# Altium PCB PCB_AD.PcbDoc
Units mil, origin at the board's own origin, x right, y up, seen from the top; angles counter-clockwise.
Board outline 1889.76 x 866.14 mil, 2 copper layers (Top Layer, Bottom Layer); 22 components, 21 nets, 96 pads, 22 vias.
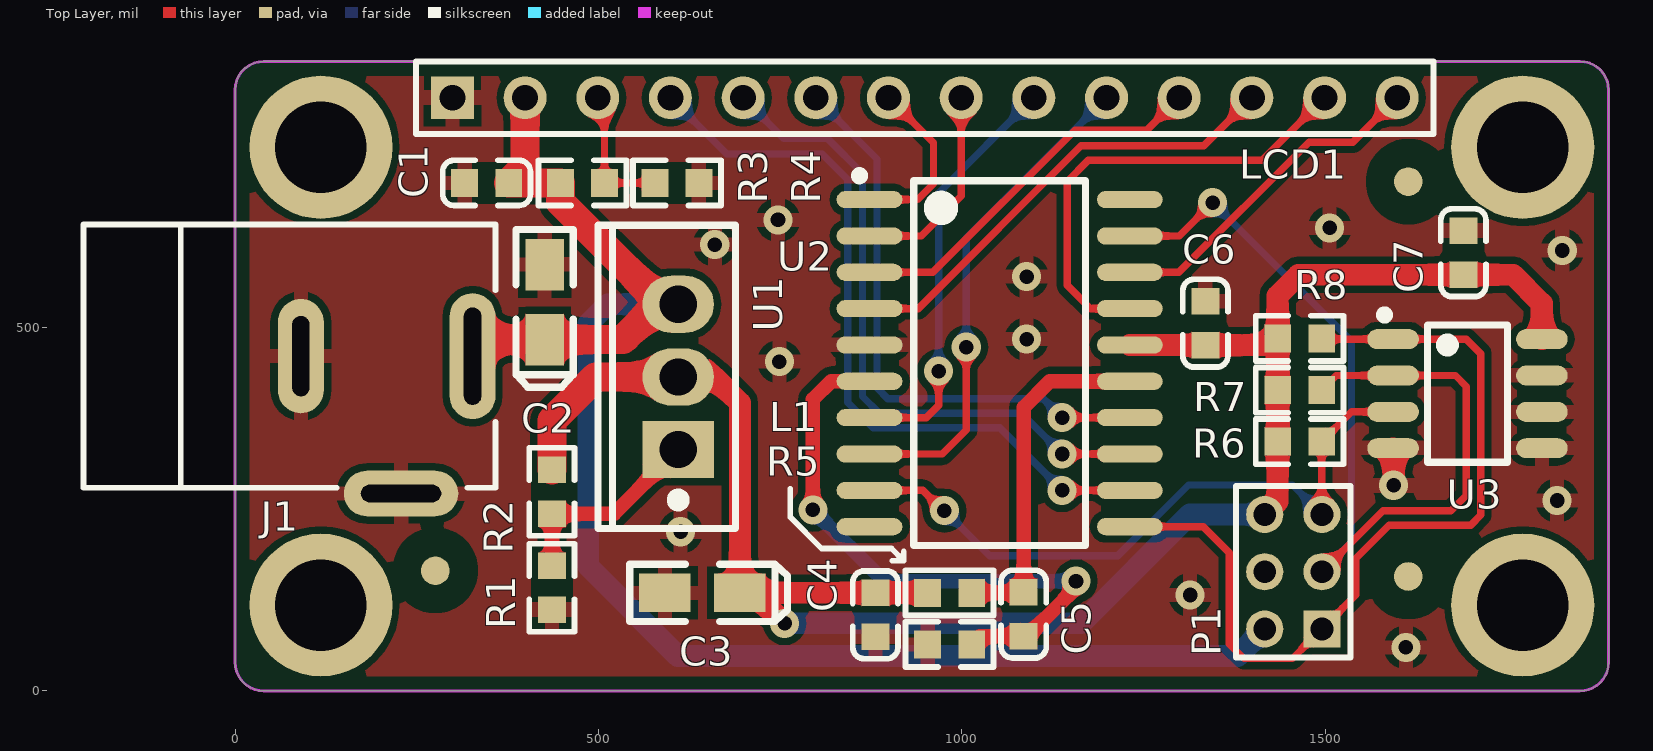
[diagram p0: Top Layer view]
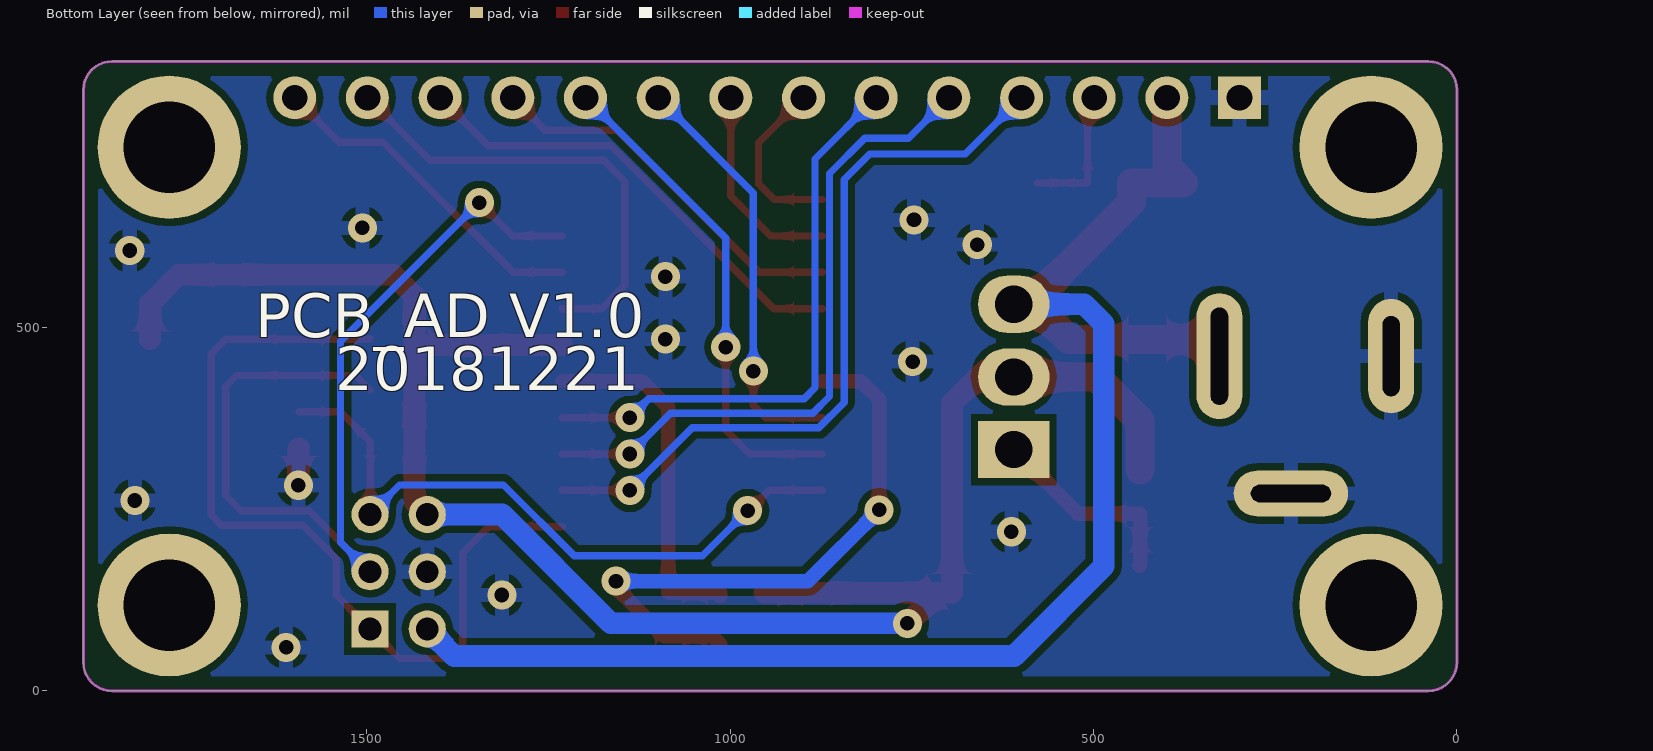
[diagram p1: Bottom Layer view, seen from below]
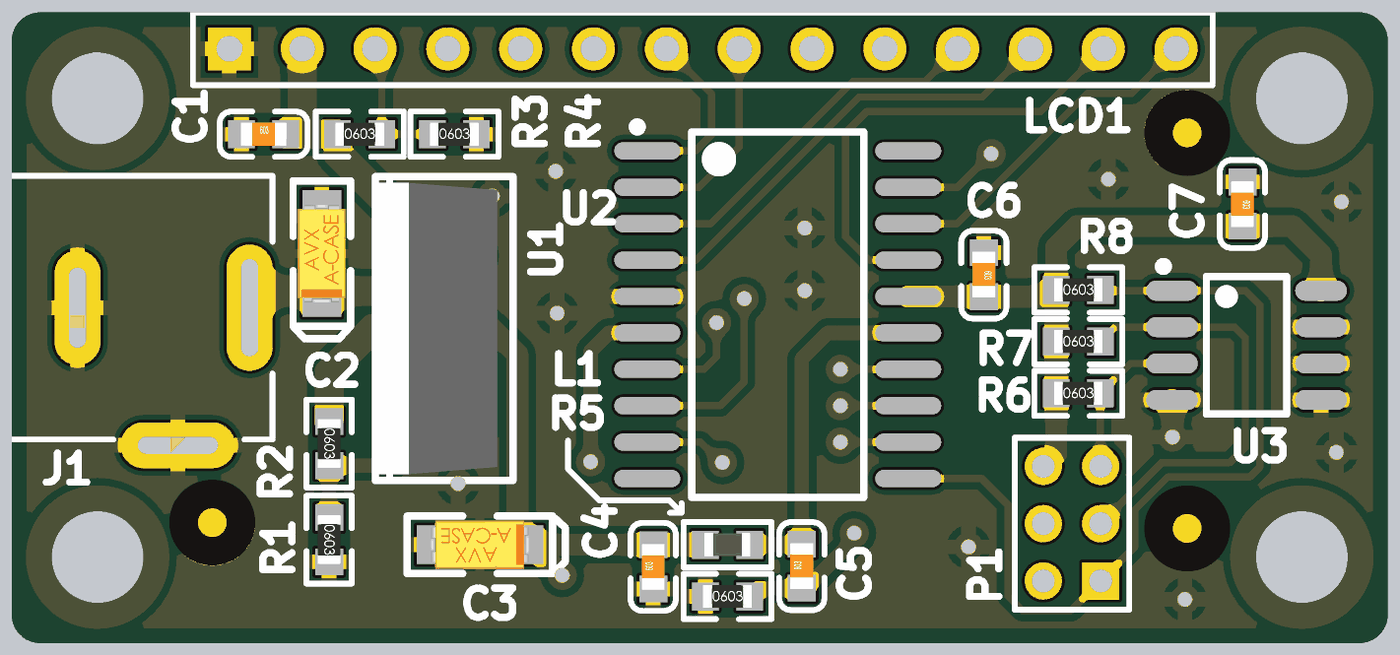
[diagram p2: 3D render of the assembled board from above, using the file's embedded part models]

## Layer stack, top to bottom
Top Solder: solder mask 0.4, Solder Resist, Dk 3.5
Top Layer: signal copper 1.4
Dielectric 1: dielectric 12.6, FR-4, Dk 4.8
Bottom Layer: signal copper 1.4
Bottom Solder: solder mask 0.4, Solder Resist, Dk 3.5

## Board outline
0,39.37 0,826.77 cw(c39.37,826.77) 39.37,866.14 1850.39,866.14 cw(c1850.39,826.77) 1889.76,826.77 1889.76,39.37 cw(c1850.39,39.37) 1850.39,0 39.37,0 cw(c39.37,39.37)

## Design rules (kind name [scope] priority, off if disabled: settings)
BoardOutlineClearance [All] p1: gap=20 ignorepadtopadclearanceinfootprint=FALSE except(0: Track-OutlineEdge; 15: THPad-OutlineEdge)
Clearance [All] p1: gap=10 ignorepadtopadclearanceinfootprint=FALSE
HoleSize [All] p1: absolutevalues=TRUE maxlimit=200 minlimit=10 maxpercent=80.000 minpercent=20.000
PlaneConnect [All] p1: planeconnectstyle=Relief reliefexpansion=20 reliefentries=4 reliefconductorwidth=20 reliefairgap=10
PolygonConnect [All] p1: connectstyle=Relief reliefconductorwidth=20 reliefentries=4 polygonreliefangle="90 Angle" airgapwidth=10
RoutingVias [All] p1: holewidth=20 width=40 viastyle="Through Hole" minholewidth=10 minwidth=20 maxholewidth=30 maxwidth=50
SilkToSolderMaskClearance [IsPad] p1: minsilkscreentomaskgap=5 clearancetoexposedcopper=TRUE
SolderMaskExpansion [All] p1: expansion=4
Width [All] p1: maxlimit=40 minlimit=10 preferedwidth=10
27 further rules are at their usual default settings.

## Classes and differential pairs
net class RB[0..7]: RB0 RB1 RB2 RB3 RB4 RB5 RB6 RB7
component class Sensor: C7 U3
component class Power: C2 C3 C4 C5 J1 L1 R1 R2 R5 U1
component class PCB_AD_Top: P1
component class MCU: C6 R6 R7 R8 U2
component class LCD: C1 LCD1 R3 R4

## Components (designator, comment, footprint, x,y, rotation, side; value= is the part's Value field where it differs from the comment)
C1 "Cap Semi" 0603_C 346,699 r0 top value=100pF
C2 "Cap Pol3" CASE-A_3216 426,535 r270 top value=100pF (schematic designator C3)
C3 "Cap Pol3" CASE-A_3216 643,135 r0 top value=100pF (schematic designator C4)
C4 "Cap Semi" 0603_C 881,104.68 r90 top value=100pF (schematic designator C5)
C5 "Cap Semi" 0603_C 1085,105.68 r90 top value=100pF (schematic designator C6)
C6 "Cap Semi" 0603_C 1335,506 r270 top value=100pF (schematic designator C2)
C7 "Cap Semi" 0603_C 1690,603 r270 top value=100pF
J1 "PWR2.5" DC005F 74.8,460.63 r0 top
L1 "Inductor" 0603_L 983,135 r0 top value=10mH
LCD1 "DMC-50448N" HDR1X14 299,816.14 r0 top
P1 "Header 3X2" PH2X3 1456,164 r90 top
R1 "Res3" 0603_R 436,142 r270 top value=8.66K (schematic designator R7)
R2 "Res3" 0603_R 436,274 r270 top value=1K (schematic designator R6)
R3 "Res3" 0603_R 478,699 r0 top value=1K (schematic designator R1)
R4 "Res3" 0603_R 608,699 r0 top value=1K (schematic designator R2)
R5 "Res3" 0603_R 983,64 r0 top value=1K (schematic designator R8)
R6 "Res3" 0603_R 1464.68,343 r0 top value=1K (schematic designator R3)
R7 "Res3" 0603_R 1464.68,414 r0 top value=1K (schematic designator R4)
R8 "Res3" 0603_R 1464.68,485 r0 top value=1K (schematic designator R5)
U1 "LM317KCT" TO-220(TO-220-3) 609.68,432.01 r90 top (schematic designator U2)
U2 "PIC16C770-I/SO" SOIC-20_300mil 1052,451 r270 top (schematic designator U1)
U3 "TCN75-3.3MOA" SOIC-8_150mil 1695.64,409 r270 top

## Footprints (in the part's own frame and the unit in brackets; to place one, negate y for a bottom-side part, rotate by r counter-clockwise, add the part's x,y. Pads: shape width x height; smd on the part's side, far side on the other; paste and mask are expansions set on the pad)
0603_C [mm]
  rect 0.93x0.98 smd: 1(-0.77,0) 2(0.77,0)
  silkscreen extent -1.53,-0.79 1.54,0.79, body extent -0.8,-0.4 0.8,0.4, height 0.3
0603_L [mm]
  rect 0.93x0.98 smd: 1(-0.77,0) 2(0.77,0)
  silkscreen extent -1.53,-0.79 1.54,0.79, body extent -0.82,-0.41 0.83,0.41, height 0.46
0603_R [mm]
  rect 0.93x0.98 smd: 1(-0.77,0) 2(0.77,0)
  silkscreen extent -1.53,-0.79 1.54,0.79, body extent -0.85,-0.4 0.85,0.4, height 0.56
CASE-A_3216 [mm]
  rect 1.8x1.35 smd: 1(1.31,0) 2(-1.31,0)
  silkscreen extent -2.54,-1 2.97,1, body extent -1.7,-0.84 1.7,0.84, height 1.71
DC005F [mm]
  oval 1.6x4.4 hole 0.6 slot 3.4 at 90 deg: 1(6.4,0)
  oval 1.6x4 hole 0.6 slot 2.8 at 90 deg: 2(0.4,0)
  oval 4x1.6 hole 0.6 slot 2.8 at 0 deg: 3(3.9,-4.8)
  rrect50% 0.4x2 on Mech13: ""(0.4,0)
  rrect50% 2x0.4 on Mech13: ""(3.9,-4.8)
  rrect50% 0.4x3 on Mech13: ""(6.4,0)
  silkscreen extent -7.2,-4.6 7.2,4.6
HDR1X14 [mm] "Connector; Header; 14 Position"
  rect 1.5x1.5 hole 0.9: 1(0,0)
  round 1.5 hole 0.9: 2(2.54,0) 3(5.08,0) 4(7.62,0) 5(10.16,0) 6(12.7,0) 7(15.24,0) 8(17.78,0) 9(20.32,0) 10(22.86,0) 11(25.4,0) 12(27.94,0) 13(30.48,0) 14(33.02,0)
  silkscreen extent -1.27,-1.27 34.29,1.27
PH2X3 [mm] "2.0"
  rect 1.3x1.3 hole 0.8: 1(-2,-1)
  round 1.3 hole 0.8: 2(-2,1) 3(0,-1) 4(0,1) 5(2,-1) 6(2,1)
  silkscreen extent -3,-2 3,2
SOIC-8_150mil [mm]
  oval 0.7x1.8 smd: 1(-1.905,-2.6) 2(-0.635,-2.6) 3(0.635,-2.6) 4(1.905,-2.6) 5(1.905,2.6) 6(0.635,2.6) 7(-0.635,2.6) 8(-1.905,2.6)
  silkscreen extent -2.9,-3.05 2.4,1.4
SOIC-20_300mil [mm]
  oval 0.6x2.3 smd: 1(-5.715,-4.55) 2(-4.445,-4.55) 3(-3.175,-4.55) 4(-1.905,-4.55) 5(-0.635,-4.55) 6(0.635,-4.55) 7(1.905,-4.55) 8(3.175,-4.55) 9(4.445,-4.55) 10(5.715,-4.55) 11(5.715,4.55) 12(4.445,4.55) 13(3.175,4.55) 14(1.905,4.55) 15(0.635,4.55) 16(-0.635,4.55) 17(-1.905,4.55) 18(-3.175,4.55) 19(-4.445,4.55) 20(-5.715,4.55)
  silkscreen extent -6.7,-5.05 6.38,3
TO-220(TO-220-3) [mm]
  rect 2x2.5 hole 1.3: 1(-2.54,0)
  oval 2x2.5 hole 1.3: 2(0,0) 3(2.54,0)
  silkscreen extent -5.3,-2 5.3,2.8, body extent -5.08,-1.45 5.08,2.9, height 19.6

## Part data
C1 C4 C5 C6 C7: "Capacitor (Semiconductor SIM Model)", LatestRevisionDate=29-May-2009, LatestRevisionNote="IPC-7351 Footprint Added.", PackageDescription="Chip Capacitor", PackageReference=C1206, Published=8-Jun-2000, Publisher="Altium Limited"
C2 C3: "Polarized Capacitor (Surface Mount)", LatestRevisionDate=29-May-2009, LatestRevisionNote="IPC-7351 Footprint Added.", PackageDescription="Chip Capacitor", PackageReference=C0805, Published=8-Jun-2000, Publisher="Altium Limited"
J1: "Low Voltage Power Supply Connector", ComponentLink1Description="Manufacturer Link", ComponentLink1URL=http://domino.kycon.com/internet/Products.html, DatasheetDocument=09-May-2002, Published=17-Dec-2003, Publisher="Altium Limited"
LCD1: "8 Character X 2 Line / LCD Display"
P1: "Header, 3-Pin, Dual row", LatestRevisionDate=17-Jul-2002, LatestRevisionNote="Re-released for DXP Platform.", Publisher="Altium Limited"
R1 R2 R3 R4 R5 R6 R7 R8: "Resistor", LatestRevisionDate=29-May-2009, LatestRevisionNote="IPC-7351 Footprint Added.", PackageDescription="Chip Resistor", PackageReference=J1-0603, Published=8-Jun-2000, Publisher="Altium Limited"
U1: library part LM317KC, "3-Terminal Adjustable Regulator", ComponentLink1Description="Manufacturer Link", ComponentLink1URL=http://www.ti.com/, DatasheetVersion=Feb-1988, Note="Pin 2 is electrically connected to tab", PackageDescription="TO, Thru-Hole, Vertical, Heatsink Mounted; 3 In-Line Leads; Pitch 2.54 mm", PackageReference=KC03, PackageVersion=Sep-1995, Published=15-Apr-2002, Publisher="Altium Limited"
U2: "8-Bit CMOS Microcontroller with 12-Bit A/D, 2K (x14-Bit words) EPROM, 256 Bytes RAM, 20-Pin SOIC, 4.0 to 5.5V Supply Range, Industrial Temperature", Supplier Part Number 1=PIC16C770-I/SO-ND, Code_IPC=SOIC127P1030-20, Code_JEDEC=MS-013-AC, ComponentAvailability="Unknown. Contact manufacturer to determine status.", ComponentLink1Description=Datasheet, ComponentLink1URL=http://ww1.microchip.com/downloads/en/DeviceDoc/41120b.pdf, ComponentLink2Description="Packaging Specification", ComponentLink2URL=http://www.microchip.com/stellent/groups/techpub_sg/documents/packagingspec/en012702.pdf, ComponentLink3Description="Microchip.com Home", ComponentLink3URL=http://www.microchip.com/, DatasheetVersion="revB, Feb-2002", LatestRevisionDate=29-Jan-2009, LatestRevisionNote="Sch. layout revised. 3D Model Removed.", PackageDescription="20-Lead Plastic Small Outline (SO) - Wide 7.50mm Body [SOIC]", PackageReference=SOIC-SO20, PackageVersion="revBB, Aug-2009", Published=11-Oct-2004, Publisher="Altium Limited", Supplier 1=Digi-Key
U3: library part TCN75, "TCN75数字温度传感器将-40°C到+125°C范围内的温度转换为数字"
L1: Code_IEC=1005, Code_JEITA=0402, LatestRevisionDate=29-May-2009, LatestRevisionNote="IPC-7351 Footprint Added.", PackageDescription="Chip Inductor", PackageReference=0402-A, Published=8-Jun-2000, Publisher="Altium Limited"

## Free pads (board coordinates)
  round 196.85 hole 125.98 unplated: ""(118.11,118.11) ""(118.11,748.03) ""(1771.65,118.11) ""(1771.65,748.03)
  round 39.37 smd paste-39.37 mask+39.37: ""(275.59,165.35) ""(1614.17,157.48) ""(1614.17,700.79)

## Via types
v1: diameter 40, hole 20, Top Layer to Bottom Layer, tented both sides, 22 vias

## Nets (pads, with @x,y where several pads share a name; then routed paths per layer and width w, separated by ;. In a path a pad name is that pad's centre, name@x,y a point inside that pad or via, vN(x,y) a via of type N, cw(c..) or ccw(c..) an arc to the next point about the centre after c; other vN are vias at no path point)
3V3: C3.1 C4.2 C6.2 C7.2 L1.1 P1.6 R2.1 R6.1 R7.1 R8.1 U1.2 U2.16 U3.8 | length 2657.8
  Top Layer w30: U1.2 658.94,432.01 694.57,396.38 C3.1 C3.1@714,135 ; v1(756,93) C3.1@714,135 ; L1.1 C4.2 C3.1@714,135 ; U2.16 1334.69,476 C6.2 1425.05,475.68 R8.1 ; P1.6 1434.37,260.48 R6.1 R7.1 R8.1 ; U3.8 1798,533 1758.32,572.68 C7.2 1463.24,572.68 1434.37,543.81 R8.1
  Top Layer w40: R2.1 436,372 496.01,432.01 U1.2
  Bottom Layer w30: U1.2@576.01,432.01 U1.2 ; v1(756,93) 1164,93 1313.74,242.74 P1.6
5V: C1.2 C2.1 J1.1 LCD1.2 P1.2 R3.1 U1.3 | length 2201.1
  Top Layer w40: J1.1 349.57,483.43 C2.1 533.79,483.43 582.37,532.01 U1.3@587.99,532.01 ; LCD1.2 399,721.68 C1.2 R3.1 447.69,672.31 U1.3@587.99,532.01 ; U1.3 U1.3@587.99,532.01
  Bottom Layer w30: U1.3 513.01,532.01 486,505 486,171.43 609.43,48 1379.37,48 P1.2
AGND: C5.1 R5.2 U2.6 | length 827.7
  Top Layer w20: v1(795,249) 795,401 820,426 U2.6 ; R5.2 1024.69,75.37 C5.1 1090.25,75.37 1157,142.12 v1(1157,151)
  Bottom Layer w20: v1(795,249) 893,151 v1(1157,151)
AVDD: C5.2 L1.2 U2.15 | length 488.6
  Top Layer w20: L1.2@1013.32,130 L1.2@1014.32,131 ; L1.2 1084,135 C5.2 1085,390 1121,426 U2.15
GND: C1.1 C2.2 C3.2 C4.1 C6.1 C7.1 J1.2 J1.3 LCD1.1 P1.4 R1.2 R4.2 R5.1 U2.5 U3.4 U3.5 U3.6 U3.7 | length 51.3
  Top Layer w30: U3.4 1594,333.28 v1(1594,283)
  other v1: 1611,60 1314,132 613,219 1819,262 749,453 1089,484 1089,570 1826,606 660,614 1506,637 747,648
NetLCD1_3: LCD1.3 R3.2 R4.1 | length 190.4
  Top Layer w10: LCD1.3 508.32,806.83 R3.2 R4.1
NetLCD1_4: LCD1.4 U2.12 | length 1035.6
  Top Layer w10: v1(1138,276) U2.12
  Bottom Layer w10: LCD1.4 676.28,738.86 808,738.86 843.14,703.72 843.14,396.86 878,362 1052,362 v1(1138,276)
NetLCD1_5: LCD1.5 U2.13 | length 920.6
  Top Layer w10: v1(1138,326) U2.13
  Bottom Layer w10: LCD1.5 754.57,760.57 814.57,760.57 863.14,712 863.14,405.14 886.28,382 1082,382 v1(1138,326) v1@1134,322
NetLCD1_6: LCD1.6 U2.14 | length 799
  Top Layer w10: v1(1138,376) U2.14
  Bottom Layer w10: LCD1.6 883.14,732 883.14,417 898.14,402 1112,402 v1(1138,376)
NetP1_1: P1.1 R8.2 U2.11 U3.1 | length 1192.4
  Top Layer w10: U2.11 1332,226 1368,190 1368,64.67 1388,44.67 1454.78,44.67 P1.1 1542,131.89 1542,182.35 1587.65,228 1700,228 1714,242 1714,464 1694,484 U3.1 1496,484 R8.2
NetP1_3: P1.3 R7.2 U2.19 U3.2 | length 1342.5
  Top Layer w10: U2.19 1299,626 v1(1345,672) ; R7.2 1515,434 U3.2 1679,434 1694,419 1694,269 1673,248 1579.37,248 P1.3
  Bottom Layer w10: v1(1345,672) 1535.96,481.04 1535.96,204.59 P1.3
NetP1_5: P1.5 R6.2 U2.9 U3.3 | length 932.6
  Top Layer w10: U2.9 946,276 974,248 v1(976,248) ; P1.5 1495,243.11 R6.2 1536,384 U3.3
  Bottom Layer w10: v1(976,248) 1038,186 1214.57,186 1311.9,283.33 1454.78,283.33 P1.5
NetR1_1: R1.1 R2.2 U1.1 | length 282.1
  Top Layer w20: R1.1@437,172.31 436,173.31 R2.2 521.36,243.68 U1.1
RB0: LCD1.7 U2.1 | length 241.1
  Top Layer w10: U2.1 939,676 961,698 961,754.14 LCD1.7
RB1: LCD1.8 U2.2 | length 284.1
  Top Layer w10: U2.2 944,626 999,681 LCD1.8
RB2: LCD1.9 U2.7 | length 579.6
  Top Layer w10: U2.7 951,376 968,393 v1(968,440)
  Bottom Layer w10: v1(968,440) 968,685.14 LCD1.9
RB3: LCD1.10 U2.8 | length 683.9
  Top Layer w10: U2.8 973,326 1006,359 v1(1006,473)
  Bottom Layer w10: v1(1006,473) 1006,623.14 LCD1.10
RB4: LCD1.11 U2.3 | length 525.6
  Top Layer w10: U2.3 960,576 1155.61,771.61 1254.47,771.61 LCD1.11
RB5: LCD1.12 U2.4 | length 646.3
  Top Layer w10: U2.4 940,526 1164,750 1332.86,750 LCD1.12
RB6: LCD1.13 U2.17 | length 644
  Top Layer w10: U2.17 1177.09,526 1145,558.09 1145,701 1174,730 1412.86,730 LCD1.13
RB7: LCD1.14 U2.18 | length 467.3
  Top Layer w10: U2.18 1298.5,576 1477.5,755 1537.86,755 LCD1.14
pads on no net: J1. U2.10 U2.20

## Polygon pours and split planes (outlines as drawn)
GND on Top Layer "Top Layer-GND" (solid, remove dead copper, pour order 5): 0,39.37 0,826.77 cw(c39.37,826.77) 39.37,866.14 1850.39,866.14 cw(c1850.39,826.77) 1889.76,826.77 1889.76,39.37 cw(c1850.39,39.37) 1850.39,0 39.37,0 cw(c39.37,39.37)
GND on Bottom Layer "Bottm Layer-GND" (solid, remove dead copper, pour order 6): 0,39.37 0,826.77 cw(c39.37,826.77) 39.37,866.14 1850.39,866.14 cw(c1850.39,826.77) 1889.76,826.77 1889.76,39.37 cw(c1850.39,39.37) 1850.39,0 39.37,0 cw(c39.37,39.37)

## Keep-outs
Keep-Out Layer:
  the board outline again, w3.94

## Other copper
Top Layer:
  pour cut-out: 1555.12,157.48 ccw(c1614.17,157.48) 1614.17,98.43 ccw(c1614.17,157.48) 1673.23,157.48 ccw(c1614.17,157.48) 1614.17,216.54 ccw(c1614.17,157.48)
  pour cut-out: 1555.43,700.65 ccw(c1614.49,700.65) 1614.49,641.59 ccw(c1614.49,700.65) 1673.54,700.65 ccw(c1614.49,700.65) 1614.49,759.7 ccw(c1614.49,700.65)
  pour cut-out: 216.42,165.95 ccw(c275.48,165.95) 275.48,106.9 ccw(c275.48,165.95) 334.53,165.95 ccw(c275.48,165.95) 275.48,225.01 ccw(c275.48,165.95)

## Silkscreen, mask and mechanical layers (free items; w line width, h text height)
Top Overlay:
  lines w7.87: 764,278 764,239 807,196 ; 888,196 807,196 ; 904,179 920,179 ; 920,192 920,179 ; 807,196 903,196 920,179
Bottom Overlay:
  text "PCB_AD V1.0" at 1653.54,486.74 h60
  text "20181221" at 1543.58,413.39 h60
Mechanical 1:
  lines w7.87: 0,39.37 ccw(c39.37,39.37) 39.37,0 ; 0,39.37 ccw(c39.37,39.37) 39.37,0 ; 0,39.37 0,826.77 ; 0,39.37 0,826.77 ; 0,826.77 cw(c39.37,826.77) 39.37,866.14 ; 0,826.77 cw(c39.37,826.77) 39.37,866.14 ; 39.37,0 1850.39,0 ; 39.37,0 1850.39,0 ; 39.37,866.14 1850.39,866.14 ; 39.37,866.14 1850.39,866.14 ; 1850.39,0 ccw(c1850.39,39.37) 1889.76,39.37 ; 1850.39,0 ccw(c1850.39,39.37) 1889.76,39.37 ; 1850.39,866.14 cw(c1850.39,826.77) 1889.76,826.77 ; 1850.39,866.14 cw(c1850.39,826.77) 1889.76,826.77 ; 1889.76,39.37 1889.76,826.77 ; 1889.76,39.37 1889.76,826.77
Mechanical 5:
  circle w7.87: c118.11,118.11 r62.99
  lines w7.87: 0,39.37 ccw(c39.37,39.37) 39.37,0

## Dimensions
118.11,118.11 to 348.25,-112.03 on Mechanical 5
0,39.37 to 118.11,118.11 on Mechanical 5
39.37,0 to 118.11,118.11 on Mechanical 5
39.37,39.37 to -106.64,-106.64 on Mechanical 5